# Altium PCB PCB2.PcbDoc (part 1 of 2)
Units mm, origin at the board's own origin, x right, y up, seen from the top; angles counter-clockwise.
Board outline 218 x 32 mm, 2 copper layers (Top Layer, Bottom Layer), stack 0.98 mm thick; 135 components, 91 nets, 363 pads, 97 vias.
Unrouted connection lines stored in the file: 1.
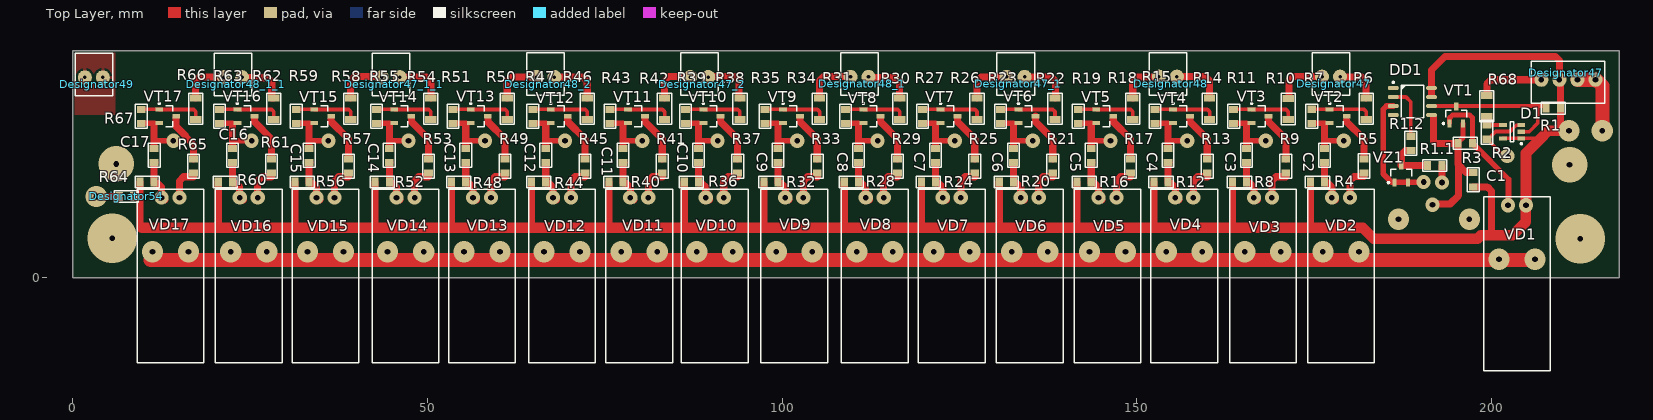
[diagram p0: Top Layer view]
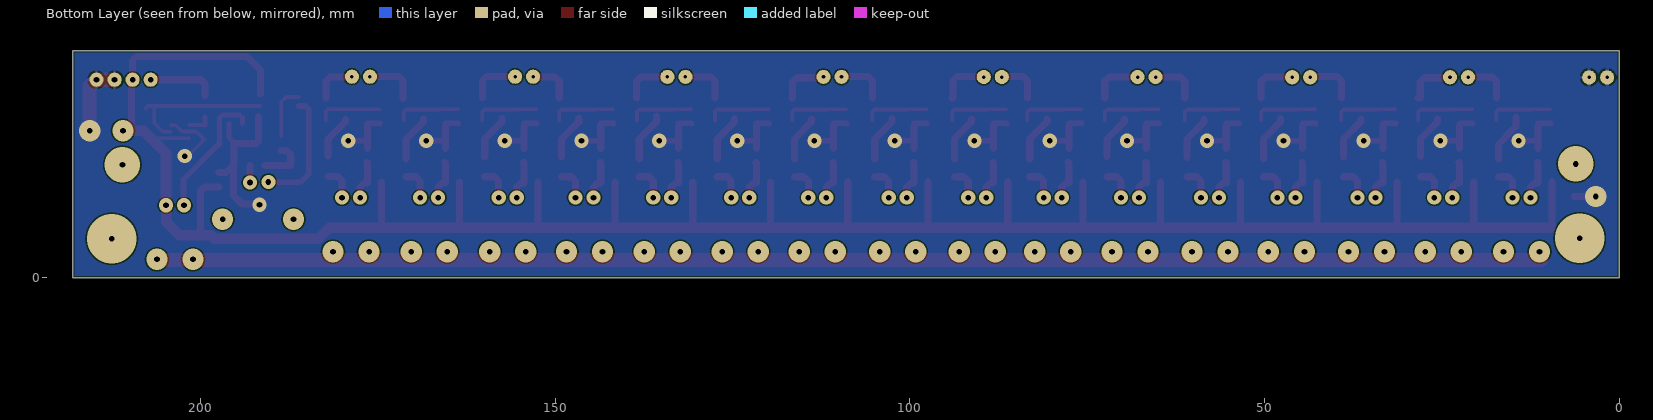
[diagram p1: Bottom Layer view, seen from below]
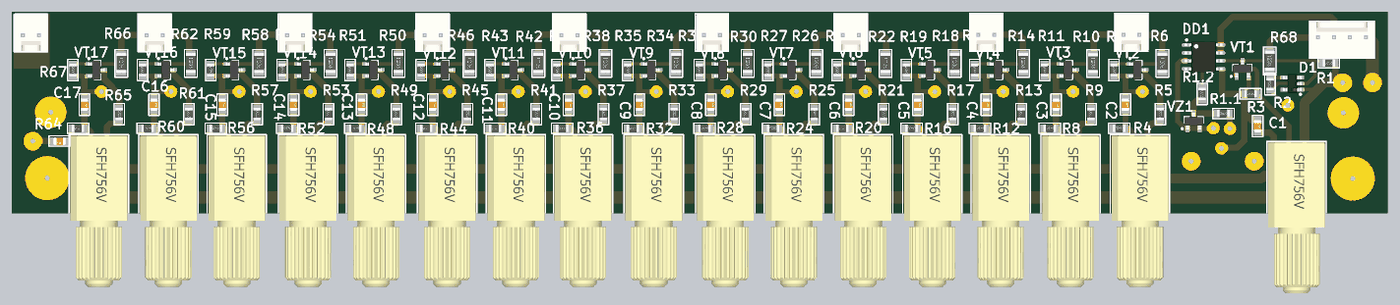
[diagram p3: 3D render of the assembled board from above, using the file's embedded part models]

## Layer stack, top to bottom
Top Solder: solder mask 0.0102, Solder Resist, Dk 3.5
Top Layer: signal copper 0.0356
Dielectric 1: dielectric 0.909, FR-4, Dk 4.8
Bottom Layer: signal copper 0.0356
Bottom Solder: solder mask 0.0102, Solder Resist, Dk 3.5

## Board outline
0,0 0,32 218,32 218,13.25 218,0 8.5,0

## Design rules (kind name [scope] priority, off if disabled: settings)
BoardOutlineClearance [All] p1: gap=0.3 ignorepadtopadclearanceinfootprint=FALSE
Clearance Clearance_MultiLayerPad [OnLayer('Multi-Layer') and IsPad] p1: gap=0.2 ignorepadtopadclearanceinfootprint=FALSE
Clearance Clearance_Polygon [InPolygon] p2: gap=0.2 ignorepadtopadclearanceinfootprint=FALSE
Clearance [All] p3: gap=0.2 ignorepadtopadclearanceinfootprint=FALSE
ComponentClearance [All] p1: gap=0.5 collisioncheckmode=3 verticalgap=0.5 showdistances=FALSE
DiffPairsRouting [All] p1: maxlimit=0.4 minlimit=0.2 mostfreqgap=0.2 toplayer_minwidth=0.2 toplayer_maxwidth=0.3 toplayer_prefwidth=0.2 bottomlayer_minwidth=0.2 bottomlayer_maxwidth=0.3 bottomlayer_prefwidth=0.2 maxuncoupledlength=12.7
Height [All] p1: minheight=0 maxheight=50 prefheight=12.7
HoleSize [All] p1: absolutevalues=TRUE maxlimit=10 minlimit=0.2 maxpercent=80.000 minpercent=20.000
HoleToHoleClearance [All] p1: gap=0.3 allowstackedmicrovias=TRUE
MinimumSolderMaskSliver [All] p1: minsoldermaskwidth=0.2
PlaneClearance [All] p1: clearance=0.5
PlaneConnect [All] p1: planeconnectstyle=Relief reliefexpansion=0.5 reliefentries=4 reliefconductorwidth=0.5 reliefairgap=0.3
PolygonConnect PolygonConnect_PadGND [InNet('GND') and IsPad] p1: connectstyle=Relief reliefconductorwidth=0.5 reliefentries=4 polygonreliefangle="90 Angle" airgapwidth=0.3
PolygonConnect PolygonConnect_Via [IsVia] p2: connectstyle=Direct reliefconductorwidth=0.254 reliefentries=4 polygonreliefangle="90 Angle" airgapwidth=0.254
PolygonConnect [All] p3: connectstyle=Relief reliefconductorwidth=0.5 reliefentries=4 polygonreliefangle="90 Angle" airgapwidth=0.3
RoomDefinition CH16 [InComponentClass('CH16')] p1: confinementstyle=ConfineIn formatcopy=TRUE lockcomponents=FALSE outline 173.785,-13.165 183.825,-13.165 183.825,31.68 173.785,31.68
RoomDefinition CH15 [InComponentClass('CH15')] p2: confinementstyle=ConfineIn formatcopy=TRUE lockcomponents=FALSE outline 162.78,-13.17 172.82,-13.17 172.82,31.675 162.78,31.675
RoomDefinition CH14 [InComponentClass('CH14')] p3: confinementstyle=ConfineIn formatcopy=TRUE lockcomponents=FALSE outline 151.71,-13.17 161.75,-13.17 161.75,31.675 151.71,31.675
RoomDefinition CH13 [InComponentClass('CH13')] p4: confinementstyle=ConfineIn formatcopy=TRUE lockcomponents=FALSE outline 140.88,-13.17 150.92,-13.17 150.92,31.675 140.88,31.675
RoomDefinition CH12 [InComponentClass('CH12')] p5: confinementstyle=ConfineIn formatcopy=TRUE lockcomponents=FALSE outline 129.92,-13.17 139.96,-13.17 139.96,31.675 129.92,31.675
RoomDefinition CH11 [InComponentClass('CH11')] p6: confinementstyle=ConfineIn formatcopy=TRUE lockcomponents=FALSE outline 118.93,-13.17 128.97,-13.17 128.97,31.675 118.93,31.675
RoomDefinition CH10 [InComponentClass('CH10')] p7: confinementstyle=ConfineIn formatcopy=TRUE lockcomponents=FALSE outline 108.06,-13.17 118.1,-13.17 118.1,31.675 108.06,31.675
RoomDefinition CH9 [InComponentClass('CH9')] p8: confinementstyle=ConfineIn formatcopy=TRUE lockcomponents=FALSE outline 96.73,-13.17 106.77,-13.17 106.77,31.675 96.73,31.675
RoomDefinition CH8 [InComponentClass('CH8')] p9: confinementstyle=ConfineIn formatcopy=TRUE lockcomponents=FALSE outline 85.51,-13.17 95.55,-13.17 95.55,31.675 85.51,31.675
RoomDefinition CH7 [InComponentClass('CH7')] p10: confinementstyle=ConfineIn formatcopy=TRUE lockcomponents=FALSE outline 74.88,-13.17 84.92,-13.17 84.92,31.675 74.88,31.675
RoomDefinition CH6 [InComponentClass('CH6')] p11: confinementstyle=ConfineIn formatcopy=TRUE lockcomponents=FALSE outline 63.98,-13.17 74.02,-13.17 74.02,31.675 63.98,31.675
RoomDefinition CH5 [InComponentClass('CH5')] p12: confinementstyle=ConfineIn formatcopy=TRUE lockcomponents=FALSE outline 52.71,-13.17 62.75,-13.17 62.75,31.675 52.71,31.675
RoomDefinition CH4 [InComponentClass('CH4')] p13: confinementstyle=ConfineIn formatcopy=TRUE lockcomponents=FALSE outline 41.93,-13.17 51.97,-13.17 51.97,31.675 41.93,31.675
RoomDefinition CH3 [InComponentClass('CH3')] p14: confinementstyle=ConfineIn formatcopy=TRUE lockcomponents=FALSE outline 30.63,-13.17 40.67,-13.17 40.67,31.675 30.63,31.675
RoomDefinition CH2 [InComponentClass('CH2')] p15: confinementstyle=ConfineIn formatcopy=TRUE lockcomponents=FALSE outline 19.81,-13.17 29.85,-13.17 29.85,31.675 19.81,31.675
RoomDefinition CH1 [InComponentClass('CH1')] p16: confinementstyle=ConfineIn formatcopy=TRUE lockcomponents=FALSE outline 8.78,-13.17 18.82,-13.17 18.82,31.675 8.78,31.675
RoomDefinition Launch [InComponentClass('Launch')] p17: confinementstyle=ConfineIn formatcopy=TRUE lockcomponents=FALSE outline 184.325,31.675 184.325,-13.5 208.425,-13.5 208.425,31.675
RoutingTopology [All] p1: topology=Vertical
RoutingVias [All] p1: holewidth=0.2 width=0.4 viastyle="Through Hole" minholewidth=0.2 minwidth=0.4 maxholewidth=0.5 maxwidth=1.2
SilkToSolderMaskClearance [IsPad] p1: minsilkscreentomaskgap=0.2 clearancetoexposedcopper=TRUE
SolderMaskExpansion [All] p1: expansion=0.075 istentingtop=FALSE
Width [All] p1: maxlimit=10 minlimit=0.2 preferedwidth=0.2
20 further rules are at their usual default settings.

## Classes and differential pairs
channel class Sh_opto_out: CH1 CH2 CH3 CH4 CH5 CH6 CH7 CH8 CH9 CH10 CH11 CH12 CH13 CH14 CH15 CH16
component class Launch: C1 D1 DD1 R1 R1.1 R1.2 R2 R3 VT1 VZ1
component class CH16: C2 R4 R5 R6 R7 VD2 VT2
component class CH15: C3 R8 R9 R11 VD3 VT3
component class CH14: C4 R12 R13 R14 R15 VD4 VT4
component class CH13: C5 R16 R17 R18 R19 VD5 VT5
component class CH12: C6 R20 R21 R22 R23 VD6 VT6
component class CH11: C7 R24 R25 R26 R27 VD7 VT7
component class CH10: C8 R28 R29 R30 R31 VD8 VT8
component class CH9: C9 R32 R33 R34 R35 VD9 VT9
component class CH8: C10 R36 R37 R38 R39 VD10 VT10
component class CH7: C11 R40 R41 R42 R43 VD11 VT11
component class CH6: C12 R44 R45 R46 R47 VD12 VT12
component class CH5: C13 R48 R49 R50 R51 VD13 VT13
component class CH4: C14 R52 R53 R54 R55 VD14 VT14
component class CH3: C15 R56 R57 R58 R59 VD15 VT15
component class CH2: C16 R60 R61 R62 R63 VD16 VT16
component class CH1: C17 R64 R65 R66 R67 VD17 VT17

## Components (designator, comment, footprint, x,y, rotation, side; value= is the part's Value field where it differs from the comment)
C1 "Ceramic capacitor, 1 μF, X7R, ±10%, 16V, 0805, -55...+125°C" "CAP: 0805" 197.425,13.825 r270 top value="1 μF" (schematic designator C2)
C2 "Ceramic capacitor, 10μF, X7R, ±10%, 16V, 0805, -55...+125°C" "CAP: 0805" 176.475,17.255 r270 top value=10μF (schematic designator C1)
C3 "Ceramic capacitor, 10μF, X7R, ±10%, 16V, 0805, -55...+125°C" "CAP: 0805" 165.47,17.25 r270 top value=10μF (schematic designator C1)
C4 "Ceramic capacitor, 10μF, X7R, ±10%, 16V, 0805, -55...+125°C" "CAP: 0805" 154.4,17.25 r270 top value=10μF (schematic designator C1)
C5 "Ceramic capacitor, 10μF, X7R, ±10%, 16V, 0805, -55...+125°C" "CAP: 0805" 143.57,17.25 r270 top value=10μF (schematic designator C1)
C6 "Ceramic capacitor, 10μF, X7R, ±10%, 16V, 0805, -55...+125°C" "CAP: 0805" 132.61,17.25 r270 top value=10μF (schematic designator C1)
C7 "Ceramic capacitor, 10μF, X7R, ±10%, 16V, 0805, -55...+125°C" "CAP: 0805" 121.62,17.25 r270 top value=10μF (schematic designator C1)
C8 "Ceramic capacitor, 10μF, X7R, ±10%, 16V, 0805, -55...+125°C" "CAP: 0805" 110.75,17.25 r270 top value=10μF (schematic designator C1)
C9 "Ceramic capacitor, 10μF, X7R, ±10%, 16V, 0805, -55...+125°C" "CAP: 0805" 99.42,17.25 r270 top value=10μF (schematic designator C1)
C10 "Ceramic capacitor, 10μF, X7R, ±10%, 16V, 0805, -55...+125°C" "CAP: 0805" 88.2,17.25 r270 top value=10μF (schematic designator C1)
C11 "Ceramic capacitor, 10μF, X7R, ±10%, 16V, 0805, -55...+125°C" "CAP: 0805" 77.57,17.25 r270 top value=10μF (schematic designator C1)
C12 "Ceramic capacitor, 10μF, X7R, ±10%, 16V, 0805, -55...+125°C" "CAP: 0805" 66.67,17.25 r270 top value=10μF (schematic designator C1)
C13 "Ceramic capacitor, 10μF, X7R, ±10%, 16V, 0805, -55...+125°C" "CAP: 0805" 55.4,17.25 r270 top value=10μF (schematic designator C1)
C14 "Ceramic capacitor, 10μF, X7R, ±10%, 16V, 0805, -55...+125°C" "CAP: 0805" 44.62,17.25 r270 top value=10μF (schematic designator C1)
C15 "Ceramic capacitor, 10μF, X7R, ±10%, 16V, 0805, -55...+125°C" "CAP: 0805" 33.32,17.25 r270 top value=10μF (schematic designator C1)
C16 "Ceramic capacitor, 10μF, X7R, ±10%, 16V, 0805, -55...+125°C" "CAP: 0805" 22.5,17.25 r270 top value=10μF (schematic designator C1)
C17 "Ceramic capacitor, 10μF, X7R, ±10%, 16V, 0805, -55...+125°C" "CAP: 0805" 11.47,17.25 r270 top value=10μF (schematic designator C1)
D1 "IC logic XOR, 1.65...5.5V, -40...+125°C, SOT23-5" SOT23-5 202.9,20.6 r180 top
DD1 "HCPL0600R2" 8-SOIC 188.85,24.85 r0 top
Designator47 "Comment" "CON: WF-04" 207.03,27.925 r0 top
Designator47 "Comment" "CON: WF-02" 178.65,28.35 r180 top
Designator47_1 "Comment" "CON: WF-02" 134.175,28.325 r180 top
Designator47_1_1 "Comment" "CON: WF-02" 46.1,28.275 r180 top
Designator47_2 "Comment" "CON: WF-02" 89.575,28.3 r180 top
Designator48 "Comment" "CON: WF-02" 155.65,28.35 r180 top
Designator48_1 "Comment" "CON: WF-02" 112.175,28.325 r180 top
Designator48_1_1 "Comment" "CON: WF-02" 23.85,28.275 r180 top
Designator48_2 "Comment" "CON: WF-02" 67.9,28.3 r180 top
Designator49 "Comment" "CON: WF-02" 4.24,28.25 r180 top
Designator54 "Comment" "CAP: 0805" 7.55,11.475 r180 top
R1 "Resistor film, 4k7, ±5%, 0805, 0.125W, -55...+125°C" "RES: 0805" 208.7,23.9 r0 top value=4k7
R1.1 "Resistor film, k, ±5%, 0805, 0.125W, -55...+125°C" "RES: 0805" 192,15.85 r0 top value=k
R1.2 "Resistor film, 30k, ±5%, 0805, 0.125W, -55...+125°C" "RES: 0805" 188.625,18.95 r270 top value=30k
R2 "Resistor film, 10k, ±5%, 0805, 0.125W, -55...+125°C" "RES: 0805" 199.375,20.525 r90 top value=10k (schematic designator R4)
R3 "Resistor film, 20k, ±5%, 0805, 0.125W, -55...+125°C" "RES: 0805" 196.3,18.975 r0 top value=20k (schematic designator R5)
R4 "Resistor film, 5R1, ±5%, 0805, 0.125W, -55...+125°C" "RES: 0805" 175.475,13.505 r180 top value=5R1 (schematic designator R5)
R5 "Resistor film, 100R, ±5%, 0805, 0.125W, -55...+125°C" "RES: 0805" 182.005,15.755 r270 top value=100R (schematic designator R4)
R6 "Resistor film, 100R, ±5%, 1206, 0.25W, -55...+125°C" "RES: 1206" 182.325,23.83 r270 top value=100R (schematic designator R2)
R7 "Resistor film, 1k, ±5%, 0805, 0.125W, -55...+125°C" "RES: 0805" 174.655,22.755 r90 top value=1k (schematic designator R3)
R8 "Resistor film, 5R1, ±5%, 0805, 0.125W, -55...+125°C" "RES: 0805" 164.47,13.5 r180 top value=5R1 (schematic designator R5)
R9 "Resistor film, 100R, ±5%, 0805, 0.125W, -55...+125°C" "RES: 0805" 171,15.75 r270 top value=100R (schematic designator R4)
R10 "Resistor film, 100R, ±5%, 1206, 0.25W, -55...+125°C" "RES: 1206" 171.35,23.8 r270 top value=100R (schematic designator R2)
R11 "Resistor film, 1k, ±5%, 0805, 0.125W, -55...+125°C" "RES: 0805" 163.65,22.75 r90 top value=1k (schematic designator R3)
R12 "Resistor film, 5R1, ±5%, 0805, 0.125W, -55...+125°C" "RES: 0805" 153.4,13.5 r180 top value=5R1 (schematic designator R5)
R13 "Resistor film, 100R, ±5%, 0805, 0.125W, -55...+125°C" "RES: 0805" 159.93,15.75 r270 top value=100R (schematic designator R4)
R14 "Resistor film, 100R, ±5%, 1206, 0.25W, -55...+125°C" "RES: 1206" 160.25,23.825 r270 top value=100R (schematic designator R2)
R15 "Resistor film, 1k, ±5%, 0805, 0.125W, -55...+125°C" "RES: 0805" 152.58,22.75 r90 top value=1k (schematic designator R3)
R16 "Resistor film, 5R1, ±5%, 0805, 0.125W, -55...+125°C" "RES: 0805" 142.57,13.5 r180 top value=5R1 (schematic designator R5)
R17 "Resistor film, 100R, ±5%, 0805, 0.125W, -55...+125°C" "RES: 0805" 149.1,15.75 r270 top value=100R (schematic designator R4)
R18 "Resistor film, 100R, ±5%, 1206, 0.25W, -55...+125°C" "RES: 1206" 149.42,23.825 r270 top value=100R (schematic designator R2)
R19 "Resistor film, 1k, ±5%, 0805, 0.125W, -55...+125°C" "RES: 0805" 141.75,22.75 r90 top value=1k (schematic designator R3)
R20 "Resistor film, 5R1, ±5%, 0805, 0.125W, -55...+125°C" "RES: 0805" 131.61,13.5 r180 top value=5R1 (schematic designator R5)
R21 "Resistor film, 100R, ±5%, 0805, 0.125W, -55...+125°C" "RES: 0805" 138.14,15.75 r270 top value=100R (schematic designator R4)
R22 "Resistor film, 100R, ±5%, 1206, 0.25W, -55...+125°C" "RES: 1206" 138.46,23.825 r270 top value=100R (schematic designator R2)
R23 "Resistor film, 1k, ±5%, 0805, 0.125W, -55...+125°C" "RES: 0805" 130.79,22.75 r90 top value=1k (schematic designator R3)
R24 "Resistor film, 5R1, ±5%, 0805, 0.125W, -55...+125°C" "RES: 0805" 120.62,13.5 r180 top value=5R1 (schematic designator R5)
R25 "Resistor film, 100R, ±5%, 0805, 0.125W, -55...+125°C" "RES: 0805" 127.15,15.75 r270 top value=100R (schematic designator R4)
R26 "Resistor film, 100R, ±5%, 1206, 0.25W, -55...+125°C" "RES: 1206" 127.47,23.825 r270 top value=100R (schematic designator R2)
R27 "Resistor film, 1k, ±5%, 0805, 0.125W, -55...+125°C" "RES: 0805" 119.8,22.75 r90 top value=1k (schematic designator R3)
R28 "Resistor film, 5R1, ±5%, 0805, 0.125W, -55...+125°C" "RES: 0805" 109.75,13.5 r180 top value=5R1 (schematic designator R5)
R29 "Resistor film, 100R, ±5%, 0805, 0.125W, -55...+125°C" "RES: 0805" 116.28,15.75 r270 top value=100R (schematic designator R4)
R30 "Resistor film, 100R, ±5%, 1206, 0.25W, -55...+125°C" "RES: 1206" 116.6,23.825 r270 top value=100R (schematic designator R2)
R31 "Resistor film, 1k, ±5%, 0805, 0.125W, -55...+125°C" "RES: 0805" 108.93,22.75 r90 top value=1k (schematic designator R3)
R32 "Resistor film, 5R1, ±5%, 0805, 0.125W, -55...+125°C" "RES: 0805" 98.42,13.5 r180 top value=5R1 (schematic designator R5)
R33 "Resistor film, 100R, ±5%, 0805, 0.125W, -55...+125°C" "RES: 0805" 104.95,15.75 r270 top value=100R (schematic designator R4)
R34 "Resistor film, 100R, ±5%, 1206, 0.25W, -55...+125°C" "RES: 1206" 105.27,23.825 r270 top value=100R (schematic designator R2)
R35 "Resistor film, 1k, ±5%, 0805, 0.125W, -55...+125°C" "RES: 0805" 97.6,22.75 r90 top value=1k (schematic designator R3)
R36 "Resistor film, 5R1, ±5%, 0805, 0.125W, -55...+125°C" "RES: 0805" 87.2,13.5 r180 top value=5R1 (schematic designator R5)
R37 "Resistor film, 100R, ±5%, 0805, 0.125W, -55...+125°C" "RES: 0805" 93.73,15.75 r270 top value=100R (schematic designator R4)
R38 "Resistor film, 100R, ±5%, 1206, 0.25W, -55...+125°C" "RES: 1206" 94.05,23.825 r270 top value=100R (schematic designator R2)
R39 "Resistor film, 1k, ±5%, 0805, 0.125W, -55...+125°C" "RES: 0805" 86.38,22.75 r90 top value=1k (schematic designator R3)
R40 "Resistor film, 5R1, ±5%, 0805, 0.125W, -55...+125°C" "RES: 0805" 76.57,13.5 r180 top value=5R1 (schematic designator R5)
R41 "Resistor film, 100R, ±5%, 0805, 0.125W, -55...+125°C" "RES: 0805" 83.1,15.75 r270 top value=100R (schematic designator R4)
R42 "Resistor film, 100R, ±5%, 1206, 0.25W, -55...+125°C" "RES: 1206" 83.42,23.825 r270 top value=100R (schematic designator R2)
R43 "Resistor film, 1k, ±5%, 0805, 0.125W, -55...+125°C" "RES: 0805" 75.75,22.75 r90 top value=1k (schematic designator R3)
R44 "Resistor film, 5R1, ±5%, 0805, 0.125W, -55...+125°C" "RES: 0805" 65.67,13.5 r180 top value=5R1 (schematic designator R5)
R45 "Resistor film, 100R, ±5%, 0805, 0.125W, -55...+125°C" "RES: 0805" 72.2,15.75 r270 top value=100R (schematic designator R4)
R46 "Resistor film, 100R, ±5%, 1206, 0.25W, -55...+125°C" "RES: 1206" 72.52,23.825 r270 top value=100R (schematic designator R2)
R47 "Resistor film, 1k, ±5%, 0805, 0.125W, -55...+125°C" "RES: 0805" 64.85,22.75 r90 top value=1k (schematic designator R3)
R48 "Resistor film, 5R1, ±5%, 0805, 0.125W, -55...+125°C" "RES: 0805" 54.4,13.5 r180 top value=5R1 (schematic designator R5)
R49 "Resistor film, 100R, ±5%, 0805, 0.125W, -55...+125°C" "RES: 0805" 60.93,15.75 r270 top value=100R (schematic designator R4)
R50 "Resistor film, 100R, ±5%, 1206, 0.25W, -55...+125°C" "RES: 1206" 61.25,23.825 r270 top value=100R (schematic designator R2)
R51 "Resistor film, 1k, ±5%, 0805, 0.125W, -55...+125°C" "RES: 0805" 53.58,22.75 r90 top value=1k (schematic designator R3)
R52 "Resistor film, 5R1, ±5%, 0805, 0.125W, -55...+125°C" "RES: 0805" 43.62,13.5 r180 top value=5R1 (schematic designator R5)
R53 "Resistor film, 100R, ±5%, 0805, 0.125W, -55...+125°C" "RES: 0805" 50.15,15.75 r270 top value=100R (schematic designator R4)
R54 "Resistor film, 100R, ±5%, 1206, 0.25W, -55...+125°C" "RES: 1206" 50.47,23.825 r270 top value=100R (schematic designator R2)
R55 "Resistor film, 1k, ±5%, 0805, 0.125W, -55...+125°C" "RES: 0805" 42.8,22.75 r90 top value=1k (schematic designator R3)
R56 "Resistor film, 5R1, ±5%, 0805, 0.125W, -55...+125°C" "RES: 0805" 32.32,13.5 r180 top value=5R1 (schematic designator R5)
R57 "Resistor film, 100R, ±5%, 0805, 0.125W, -55...+125°C" "RES: 0805" 38.85,15.75 r270 top value=100R (schematic designator R4)
R58 "Resistor film, 100R, ±5%, 1206, 0.25W, -55...+125°C" "RES: 1206" 39.17,23.825 r270 top value=100R (schematic designator R2)
R59 "Resistor film, 1k, ±5%, 0805, 0.125W, -55...+125°C" "RES: 0805" 31.5,22.75 r90 top value=1k (schematic designator R3)
R60 "Resistor film, 5R1, ±5%, 0805, 0.125W, -55...+125°C" "RES: 0805" 21.5,13.5 r180 top value=5R1 (schematic designator R5)
R61 "Resistor film, 100R, ±5%, 0805, 0.125W, -55...+125°C" "RES: 0805" 28.03,15.75 r270 top value=100R (schematic designator R4)
R62 "Resistor film, 100R, ±5%, 1206, 0.25W, -55...+125°C" "RES: 1206" 28.35,23.825 r270 top value=100R (schematic designator R2)
R63 "Resistor film, 1k, ±5%, 0805, 0.125W, -55...+125°C" "RES: 0805" 20.68,22.75 r90 top value=1k (schematic designator R3)
R64 "Resistor film, 5R1, ±5%, 0805, 0.125W, -55...+125°C" "RES: 0805" 10.47,13.5 r180 top value=5R1 (schematic designator R5)
R65 "Resistor film, 100R, ±5%, 0805, 0.125W, -55...+125°C" "RES: 0805" 17,15.75 r270 top value=100R (schematic designator R4)
R66 "Resistor film, 100R, ±5%, 1206, 0.25W, -55...+125°C" "RES: 1206" 17.32,23.825 r270 top value=100R (schematic designator R2)
R67 "Resistor film, 1k, ±5%, 0805, 0.125W, -55...+125°C" "RES: 0805" 9.65,22.75 r90 top value=1k (schematic designator R3)
R68 "Resistor film, 100R, ±5%, 1206, 0.25W, -55...+125°C" "RES: 1206" 199.335,24.2 r270 top value=100R (schematic designator R2)
VD1 "SHF250" "LED: SFH757" 203.585,6.41 r0 top (schematic designator VD2)
VD2 "SHF757" "LED: SFH757" 178.77,7.495 r0 top (schematic designator VD1)
VD3 "SHF757" "LED: SFH757" 167.765,7.49 r0 top (schematic designator VD1)
VD4 "SHF757" "LED: SFH757" 156.695,7.49 r0 top (schematic designator VD1)
VD5 "SHF757" "LED: SFH757" 145.865,7.49 r0 top (schematic designator VD1)
VD6 "SHF757" "LED: SFH757" 134.905,7.49 r0 top (schematic designator VD1)
VD7 "SHF757" "LED: SFH757" 123.915,7.49 r0 top (schematic designator VD1)
VD8 "SHF757" "LED: SFH757" 113.045,7.49 r0 top (schematic designator VD1)
VD9 "SHF757" "LED: SFH757" 101.715,7.49 r0 top (schematic designator VD1)
VD10 "SHF757" "LED: SFH757" 90.495,7.49 r0 top (schematic designator VD1)
VD11 "SHF757" "LED: SFH757" 79.865,7.49 r0 top (schematic designator VD1)
VD12 "SHF757" "LED: SFH757" 68.965,7.49 r0 top (schematic designator VD1)
VD13 "SHF757" "LED: SFH757" 57.695,7.49 r0 top (schematic designator VD1)
VD14 "SHF757" "LED: SFH757" 46.915,7.49 r0 top (schematic designator VD1)
VD15 "SHF757" "LED: SFH757" 35.615,7.49 r0 top (schematic designator VD1)
VD16 "SHF757" "LED: SFH757" 24.795,7.49 r0 top (schematic designator VD1)
VD17 "SHF757" "LED: SFH757" 13.765,7.49 r0 top (schematic designator VD1)
VT1 "NPN transistor, 45V, 100mA, 100MHz, 300mW, 0.6V, 420, SOT-23, -55...+125°C" SOT23 195.025,22.95 r90 top (schematic designator VT2)
VT2 "MOSFET N-channel transistor, 80V, 7A, 9.1nC, 2.5W, 34mOhm, 756pF, 8-TDSON, -55...+150°C" SOT23 178.38,22.78 r0 top (schematic designator VT1)
VT3 "MOSFET N-channel transistor, 80V, 7A, 9.1nC, 2.5W, 34mOhm, 756pF, 8-TDSON, -55...+150°C" SOT23 167.375,22.775 r0 top (schematic designator VT1)
VT4 "MOSFET N-channel transistor, 80V, 7A, 9.1nC, 2.5W, 34mOhm, 756pF, 8-TDSON, -55...+150°C" SOT23 156.305,22.775 r0 top (schematic designator VT1)
VT5 "MOSFET N-channel transistor, 80V, 7A, 9.1nC, 2.5W, 34mOhm, 756pF, 8-TDSON, -55...+150°C" SOT23 145.475,22.775 r0 top (schematic designator VT1)
VT6 "MOSFET N-channel transistor, 80V, 7A, 9.1nC, 2.5W, 34mOhm, 756pF, 8-TDSON, -55...+150°C" SOT23 134.515,22.775 r0 top (schematic designator VT1)
VT7 "MOSFET N-channel transistor, 80V, 7A, 9.1nC, 2.5W, 34mOhm, 756pF, 8-TDSON, -55...+150°C" SOT23 123.525,22.775 r0 top (schematic designator VT1)
VT8 "MOSFET N-channel transistor, 80V, 7A, 9.1nC, 2.5W, 34mOhm, 756pF, 8-TDSON, -55...+150°C" SOT23 112.655,22.775 r0 top (schematic designator VT1)
VT9 "MOSFET N-channel transistor, 80V, 7A, 9.1nC, 2.5W, 34mOhm, 756pF, 8-TDSON, -55...+150°C" SOT23 101.325,22.775 r0 top (schematic designator VT1)
VT10 "MOSFET N-channel transistor, 80V, 7A, 9.1nC, 2.5W, 34mOhm, 756pF, 8-TDSON, -55...+150°C" SOT23 90.105,22.775 r0 top (schematic designator VT1)
VT11 "MOSFET N-channel transistor, 80V, 7A, 9.1nC, 2.5W, 34mOhm, 756pF, 8-TDSON, -55...+150°C" SOT23 79.475,22.775 r0 top (schematic designator VT1)
VT12 "MOSFET N-channel transistor, 80V, 7A, 9.1nC, 2.5W, 34mOhm, 756pF, 8-TDSON, -55...+150°C" SOT23 68.575,22.775 r0 top (schematic designator VT1)
VT13 "MOSFET N-channel transistor, 80V, 7A, 9.1nC, 2.5W, 34mOhm, 756pF, 8-TDSON, -55...+150°C" SOT23 57.305,22.775 r0 top (schematic designator VT1)
VT14 "MOSFET N-channel transistor, 80V, 7A, 9.1nC, 2.5W, 34mOhm, 756pF, 8-TDSON, -55...+150°C" SOT23 46.525,22.775 r0 top (schematic designator VT1)
VT15 "MOSFET N-channel transistor, 80V, 7A, 9.1nC, 2.5W, 34mOhm, 756pF, 8-TDSON, -55...+150°C" SOT23 35.225,22.775 r0 top (schematic designator VT1)
VT16 "MOSFET N-channel transistor, 80V, 7A, 9.1nC, 2.5W, 34mOhm, 756pF, 8-TDSON, -55...+150°C" SOT23 24.405,22.775 r0 top (schematic designator VT1)
VT17 "MOSFET N-channel transistor, 80V, 7A, 9.1nC, 2.5W, 34mOhm, 756pF, 8-TDSON, -55...+150°C" SOT23 13.375,22.775 r0 top (schematic designator VT1)
VZ1 "Diode array, 85V, 140mA, 1.1V, 3us, SOT-23, -65...+150°C" SOT23 187.275,14.625 r90 top

## Footprints (in the part's own frame and the unit in brackets; to place one, negate y for a bottom-side part, rotate by r counter-clockwise, add the part's x,y. Pads: shape width x height; smd on the part's side, far side on the other; paste and mask are expansions set on the pad)
8-SOIC [mm] "pitch 1.27 mm"
  rrect100% 1.55x0.6 smd: 1(-2.7,1.905) 2(-2.7,0.635) 3(-2.7,-0.635) 4(-2.7,-1.905) 5(2.7,-1.905) 6(2.7,-0.635) 7(2.7,0.635) 8(2.7,1.905)
  round 0.7 on Mech1: 28(-2.395,1.8)
  silkscreen extent -2.82,-2.3 1.61,2.82, body extent -3,-2.45 3,2.45, height 1.75
"CAP: 0805" [mm]
  rect 1x1.25 smd: 1(-1,0) 2(1,0)
  silkscreen extent -1.7,-0.82 1.7,0.82, body extent -1,-0.62 1,0.63, height 0.78
"CON: WF-02" [mm]
  round 2 hole 0.5: 1(0,0) 2(2.54,0)
  round 0.5 on Mech1: ""(-0.8,2)
  silkscreen extent -1.4,-3.4 3.9,2.6, body extent -1.3,-3.3 3.78,2.5, height 11.5
"CON: WF-04" [mm]
  round 2 hole 0.8: 1(0,0) 2(2.54,0) 3(5.08,0) 4(7.62,0)
  round 0.5 on Mech1: ""(-0.8,2)
  silkscreen extent -1.4,-3.3 8.9,2.6, body extent -1.33,-3.27 8.83,2.53, height 11.66
"LED: SFH757" [mil]
  round 60 hole 31.5: 1(-50,150) 2(50,150) 3(-100,-150) 4(100,-150)
  silkscreen extent -185,-768 185,197, body extent -177,-756 177,189, height 390
"RES: 0805" [mm]
  rect 1x1.25 smd: 1(-1,0) 2(1,0)
  silkscreen extent -1.7,-0.82 1.7,0.82, body extent -1,-0.6 1,0.6, height 0.44
"RES: 1206" [mm]
  rect 1x1.6 smd: 1(-1.5,0) 2(1.5,0)
  silkscreen extent -2.2,-1 2.2,1, body extent -1.65,-0.8 1.55,0.8, height 0.47
SOT23 [mm]
  rect 1.1x0.6 smd: 1(-1.2,0.95) 2(-1.2,-0.95) 3(1.2,0)
  round 0.5 on Mech1: ""(-0.9,1.1)
  silkscreen extent -1.32,-1.5 0.7,1.92, body extent -1.32,-1.52 1.32,1.52, height 1.12
SOT23-5 [mm] "pitch 0.95 mm"
  rect 1.1x0.6 smd: 1(-1.3,0.95) 2(-1.3,0) 3(-1.3,-0.95) 4(1.3,-0.95) 5(1.3,0.95)
  round 0.5 on Mech1: ""(-1.1,1.1)
  silkscreen extent -1.43,-1.4 0.25,1.82, body extent -1.5,-1.5 1.5,1.5, height 1.3

## Part data
C1 C2 C3 C4 C5 C6 C7 C8 C9 C10 C11 C12 C13 C14 C15 C16 C17: library part Ceramic_0805, Manufacturer=Yageo, Package=0805, PartNumber=CC0805KRX7R7BB104, Temperature=-55...+125°C, Tolerance=±10%, TypeCapacitor="Ceramic capacitor", TypeDielectric=X7R, Voltage=16V, HelpURL=https://www.digikey.com/product-detail/en/yageo/CC0805KRX7R7BB104/311-1142-1-ND/303052
  C1: ValueManufacturerPartNumber="Ceramic capacitor, 1 μF, X7R, ±10%, 16V, 0805, -55...+125°C"
  C2 C3 C4 C5 C6 C7 C8 C9 C10 C11 C12 C13 C14 C15 C16 C17: ValueManufacturerPartNumber="Ceramic capacitor, 10μF, X7R, ±10%, 16V, 0805, -55...+125°C"
D1: library part SN74LVC1G86DBVR, "XOR", Manufacturer="Texas Instruments", Package=SOT23-5, PartNumber=74AHC1G86, Temperature=-40...+125°C, ComponentType="IC logic XOR", HelpURL=https://www.digikey.com/product-detail/en/texas-instruments/SN74LVC1G86DBVR/296-9853-1-ND/380077, Supply=1.65...5.5V, ValueManufacturerPartNumber="IC logic XOR, 1.65...5.5V, -40...+125°C, SOT23-5"
R1 R1.1 R1.2 R2 R3 R4 R5 R7 R8 R9 R11 R12 R13 R15 R16 R17 R19 R20 R21 R23 R24 R25 R27 R28 R29 R31 R32 R33 R35 R36 R37 R39 R40 R41 R43 R44 R45 R47 R48 R49 R51 R52 R53 R55 R56 R57 R59 R60 R61 R63 R64 R65 R67: library part Resistor_0805, Manufacturer=Yageo, Package=0805, PartNumber=RC0805JR-07100RL, Power=0.125W, Temperature=-55...+125°C, Tolerance=±5%, TypeResistor="Resistor film", HelpURL=https://www.digikey.com/product-detail/en/yageo/RC0805JR-07100RL/311-100ARCT-ND/731185
  R1: ValueManufacturerPartNumber="Resistor film, 4k7, ±5%, 0805, 0.125W, -55...+125°C"
  R1.1: ValueManufacturerPartNumber="Resistor film, k, ±5%, 0805, 0.125W, -55...+125°C"
  R1.2: ValueManufacturerPartNumber="Resistor film, 30k, ±5%, 0805, 0.125W, -55...+125°C"
  R2: ValueManufacturerPartNumber="Resistor film, 10k, ±5%, 0805, 0.125W, -55...+125°C"
  R3: ValueManufacturerPartNumber="Resistor film, 20k, ±5%, 0805, 0.125W, -55...+125°C"
  R4 R8 R12 R16 R20 R24 R28 R32 R36 R40 R44 R48 R52 R56 R60 R64: ValueManufacturerPartNumber="Resistor film, 5R1, ±5%, 0805, 0.125W, -55...+125°C"
  R5 R9 R13 R17 R21 R25 R29 R33 R37 R41 R45 R49 R53 R57 R61 R65: ValueManufacturerPartNumber="Resistor film, 100R, ±5%, 0805, 0.125W, -55...+125°C"
  R7 R11 R15 R19 R23 R27 R31 R35 R39 R43 R47 R51 R55 R59 R63 R67: ValueManufacturerPartNumber="Resistor film, 1k, ±5%, 0805, 0.125W, -55...+125°C"
R6 R10 R14 R18 R22 R26 R30 R34 R38 R42 R46 R50 R54 R58 R62 R66 R68: library part Resistor_1206, Manufacturer=Yageo, Package=1206, PartNumber=RC1206JR-07100RL, Power=0.25W, Temperature=-55...+125°C, Tolerance=±5%, TypeResistor="Resistor film", HelpURL=https://www.digikey.com/product-detail/en/yageo/RC1206JR-07100RL/311-100ERCT-ND/732153, ValueManufacturerPartNumber="Resistor film, 100R, ±5%, 1206, 0.25W, -55...+125°C"
VT1: library part BJT_NPN_132, CurrentCE=100mA, CurrentGain=420, Frequency=100MHz, Manufacturer="ON Semiconductor", MaxPower=300mW, Package=SOT-23, PartNumber=PMBT2369, Temperature=-55...+125°C, VoltageCE=45V, VoltageSaturation=0.6V, HelpURL=https://www.digikey.com/product-detail/en/on-semiconductor/BC847CLT1G/BC847CLT1GOSCT-ND/917836, TypeTransistor="NPN transistor", ValueManufacturerPartNumber="NPN transistor, 45V, 100mA, 100MHz, 300mW, 0.6V, 420, SOT-23, -55...+125°C"
VT2 VT3 VT4 VT5 VT6 VT7 VT8 VT9 VT10 VT11 VT12 VT13 VT14 VT15 VT16 VT17: library part MOSFET_N_132, CurrentDS=7A, InputCapacitor=756pF, Manufacturer="Infineon Technologies", MaxPower=2.5W, Package=8-TDSON, PartNumber=IRLML, Temperature=-55...+150°C, VoltageDS=80V, GateCharge=9.1nC, HelpURL=https://www.digikey.com/product-detail/en/infineon-technologies/BSC340N08NS3GATMA1/BSC340N08NS3GATMA1TR-ND/2080655, RDS=34mOhm, TypeTransistor="MOSFET N-channel transistor", ValueManufacturerPartNumber="MOSFET N-channel transistor, 80V, 7A, 9.1nC, 2.5W, 34mOhm, 756pF, 8-TDSON, -55...+150°C"
VZ1: library part Diode_array, Current=140mA, Manufacturer="Diodes Incorporated", Package=SOT-23, PartNumber=BAV199-7-F, Temperature=-65...+150°C, Voltage=85V, VoltageDrop=1.1V, HelpURL=https://www.digikey.com/product-detail/en/diodes-incorporated/BAV199-7-F/BAV199-FDICT-ND/1033647, RecoveryTime=3us, TypeDiode="Diode array", ValueManufacturerPartNumber="Diode array, 85V, 140mA, 1.1V, 3us, SOT-23, -65...+150°C"

## Via types
v1: diameter 2, hole 0.8, Top Layer to Bottom Layer, 54 vias
v2: diameter 3, hole 0.8, Top Layer to Bottom Layer, 39 vias
v3: diameter 5, hole 0.8, Top Layer to Bottom Layer, 2 vias
v4: diameter 7, hole 0.8, Top Layer to Bottom Layer, 2 vias